# Altium PCB cricket-node-hw__B.PcbDoc (part 2 of 3)
Units mil, origin at the board's own origin, x right, y up, seen from the top; angles counter-clockwise.
Board outline 2830 x 2830 mil, 4 copper layers (Top Layer, GND1, PWR/SIG, Bottom Layer), stack 61.7 mil thick; 153 components, 116 nets, 542 pads, 320 vias.
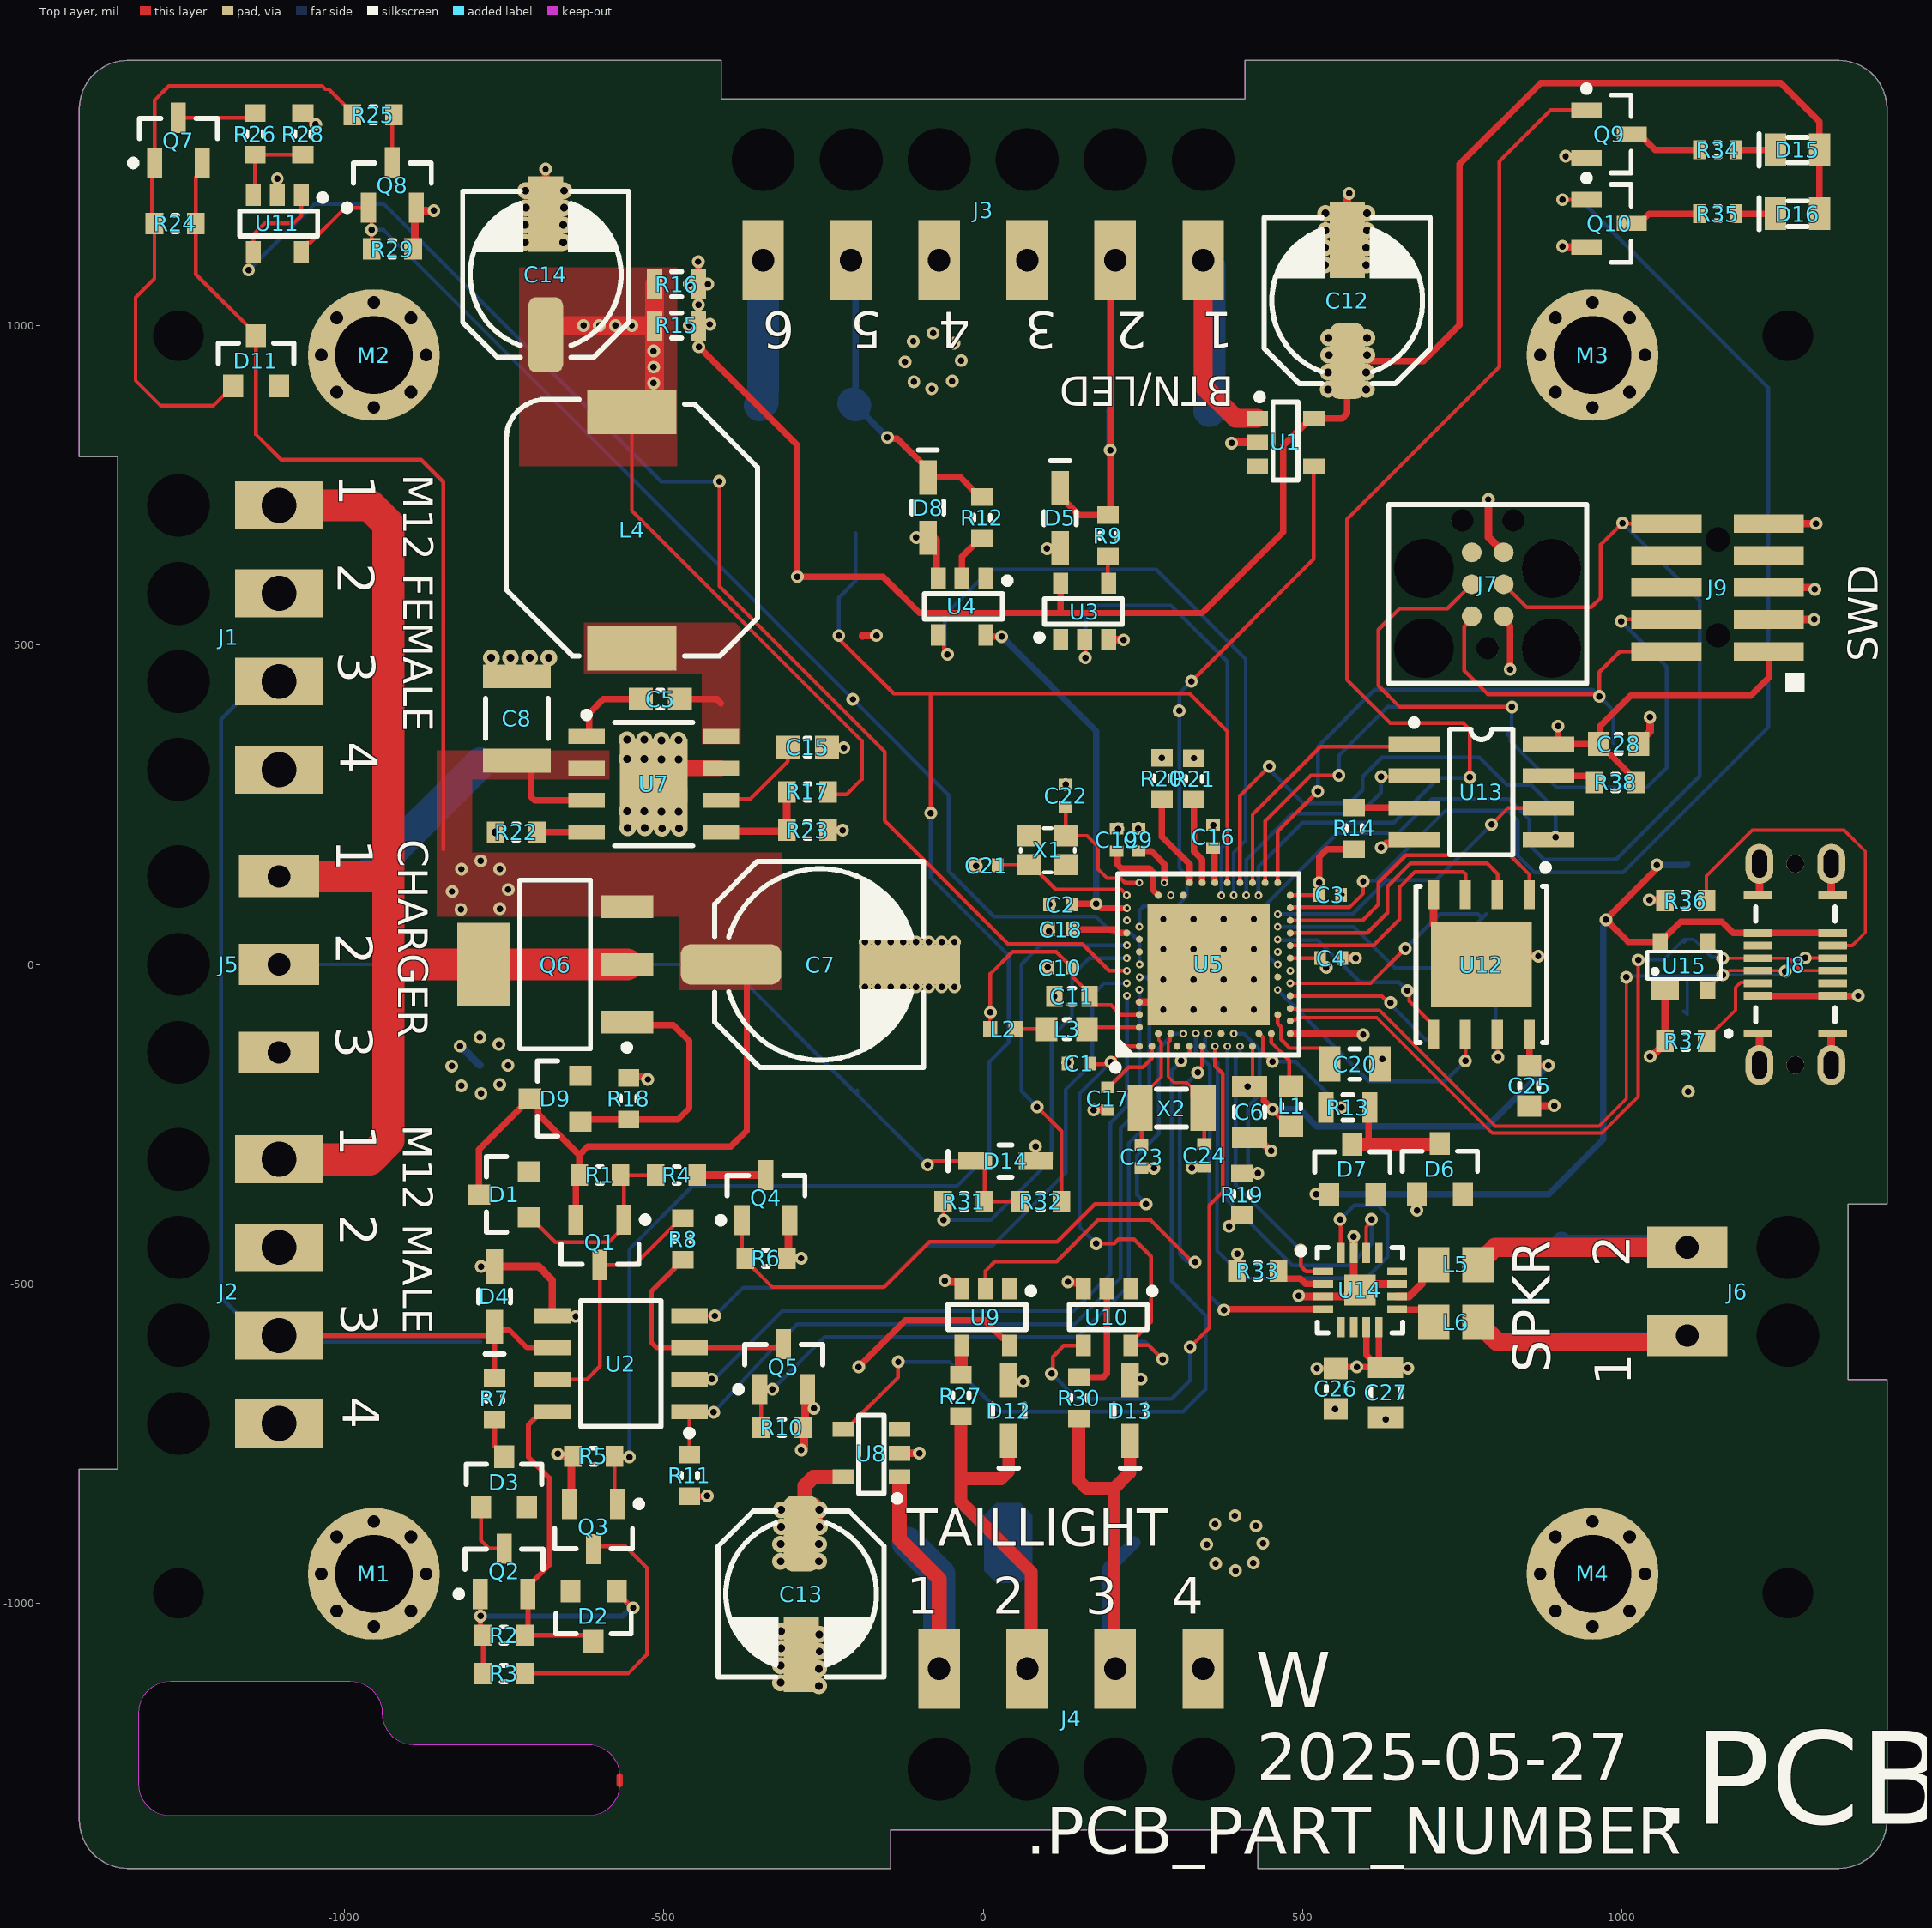
[diagram p0: Top Layer view]

## Part data (continued)
R34 R35: library part ERJ-3EKF3300V, "RES 330 OHM 1/10W 1% 0603 SMD", Limiting Element Voltage=75, Manufacturer="Panasonic Electronic Components", Maximum Overload Voltage=150, Maximum Working Voltage=5.7V, Package="0603 (1608 Metric)", Package Power="0603  (0.1W)", Power (Watts)="0.1W- 1/10W", Ratings=AEC-Q200, Resistance (Ohms)=330, Sort Value=330.0, Sort Value Package=603_330, Supplier Package=603, Temperature Coefficient=±100ppm/°C, Tolerance=±1%, cad-reference=ERJ-3EKF3300V, Category=Resistors, Composition="Thick Film", Features=-, Height=0.55MM, kicad-footprint=R0603_0.55MM_HD:R0603_0.55MM_HD, kicad-symbol=Resistor:R_2P, Manufacturer 1="Panasonic Electronic Components", Manufacturer Part Number=ERJ-3EKF3300V, Manufacturer Part Number 1=ERJ-3EKF3300V, Number of Terminations=2, Packaging="Cut Tape (CT)", Substitution Notes="330 , ±1% , 0603 , AEC-Q200"
R36 R37: library part ERJ-3EKF5101V, "RES 5.1K OHM 1/10W 1% 0603 SMD", JLCPCB Part #=C123727, Limiting Element Voltage=75, Manufacturer="Panasonic Electronic Components", Maximum Overload Voltage=150, Maximum Working Voltage=22.6V, Package="0603 (1608 Metric)", Package Power="0603  (0.1W)", Power (Watts)="0.1W- 1/10W", Ratings=AEC-Q200, Resistance (Ohms)=5.1k, Sort Value=5100, Sort Value Package=603_5100, Supplier Package=0603, Temperature Coefficient=±100ppm/°C, Tolerance=±1%, Category=Resistors, Composition="Thick Film", Features=-, Height=0.55MM, id=5433, is_external=1, Manufacturer 1="Panasonic Electronic Components", Manufacturer Part Number=ERJ-3EKF5101V, Manufacturer Part Number 1=ERJ-3EKF5101V, Number of Terminations=2, Packaging="Cut Tape (CT)", Substitution Notes="5.1k , ±1% , 0603 , AEC-Q200"
TP1 TP2 TP3 TP4 TP5 TP6 TP7 TP8 TP9 TP10 TP11 TP12 TP13 TP14 TP15 TP16 TP17 TP18 TP19 TP20 TP21 TP22 TP23 TP24 TP25 TP26 TP27: library part SMT_TP-1MM, Manufacturer=Wavenumber, cad-reference=SMT_TP-1MM, Flags=NO_BOM, kicad-footprint=SMT_TP-1MM:SMT_TP-1MM, kicad-symbol=SMT_TEST:SMT_TEST, Manufacturer Part Number=SMT_TP-1MM
U1 U8: "2.7V~5.5V 50mΩ 2.5A 1 SOT-25  Power Distribution Switches ROHS", JLCPCB Part #=C3001659, Manufacturer="Diodes Incorporated", cad-reference=AP22804AW5-7, Manufacturer Part Number=AP22804AW5-7
U2: "1 Transceiver Full Duplex 1 SOIC-8 LIN Transceivers ROHS", JLCPCB Part #=C128810, Manufacturer=NXP, id=3710, is_external=1, Manufacturer Part Number=TJA1021T/20/CM,118
U3 U4 U9 U10: "Buffer, Non-Inverting 1 Element 1 Bit per Element Push-Pull Output SOT-23-5", Internal Part Number=NAN, JLCPCB Part #=C100024, Manufacturer="Texas Instruments", Flags=NAN, Manufacturer Part Number=SN74LV1T34DBVR
U5: "Cortex M4 MCU IC RF TXRX+MCU 802.15.4 73QFN", JLCPCB Part #=C190794, Manufacturer=Nordic, Manufacturer Part Number=NRF52840-QIAA-R
U7: "3.8V to 40V Input, 3.5A Low IQ Synchronous Buck Converter", JLCPCB Part #=C2071665, Manufacturer="Diodes Inc", cad-reference=AP64352SP-13, Category=ic, kicad-footprint=SO8-EP:SO8-EP, kicad-symbol=AP64352SP-13:AP64352SP-13, Manufacturer Part Number=AP64352SP-13, table=regulator_switching
U11: "Single 1pA 2V/us 1.9MHz SOT-25 Operational Amplifier ROHS", JLCPCB Part #=C150498, Manufacturer="Diodes Inc", id=3706, is_external=1, Manufacturer Part Number=TLV271CW5-7
U12: "Ultra low power, 64M-bit, serial multi I/O flash memory", JLCPCB Part #=C2802849, Manufacturer=Macronix, Manufacturer Part Number=MX25R6435FZNIL0
U13: "16Kbit 20MHz SPI SOIC-8 FRAM ROHS", Internal Part Number=nan, JLCPCB Part #=C466849, Manufacturer="Infineon Technologies", cad-reference=FM25L16B-GTR, fram#csv.Flags_1=nan, kicad-footprint="SOIC 8:SOIC 8", kicad-symbol=FM25-FRAM:FM25-FRAM, Manufacturer Part Number=FM25L16B-GTR
U14: "Monaural 3.2Wx2@4O TQFN-16-EP(3x3) Audio Amplifiers ROHS", JLCPCB Part #=C910544, Manufacturer=Maxim, Package="TQFN-16 Maxim", Availability=Unavailable, id=9195, is_external=1, Manufacturer Part Number=MAX98357AETE+T, Price=None, SnapEDA_Link=https://www.snapeda.com/parts/MAX98357AETE%2BT/Maxim%20Integrated/view-part/48842/?ref=snap
U15: "6V Unidirectional 5.5V SOT-143 ESD and Surge Protection (TVS/ESD) ROHS", JLCPCB Part #=C12333, Manufacturer=Nexperia, id=3714, is_external=1, Manufacturer Part Number=PRTR5V0U2X,215
X1: library part ECS-320-8-37B-CKY-TR, "32MHz 8pF ±10ppm SMD2016-4P", JLCPCB Part #=C2636238, Manufacturer=ECS, Package Power="PACKAGE (POWER)", cad-reference=ECS-320-8-37B-CKY-TR, Category=crystals/smt, kicad-footprint=XTAL_2016:XTAL_2016, kicad-symbol=Crystal:CRYSTAL-4P--1-3, Manufacturer Part Number=ECS-320-8-37B-CKY-TR
X2: library part NX3215SA-32.768K-STD-MUA-9, "32.768kHz 9pF ±20ppm SMD3215-2P", JLCPCB Part #=C519280, Manufacturer=NDK, Package Power="PACKAGE (POWER)", cad-reference=NX3215SA-32.768K-STD-MUA-9, Category=crystals/smt, kicad-footprint=XTAL_3215:XTAL_3215, kicad-symbol=Crystal:CRYSTAL-2P--1-2, Manufacturer Part Number=NX3215SA-32.768K-STD-MUA-9

## Free pads (board coordinates)
  rect 0x0 hole 78.74 unplated: G1(-1259.84,-984.25) G1(-1259.84,984.25) G1(1259.84,-984.25) G1(1259.84,984.25)

## Via types
v1: diameter 20, hole 10, Top Layer to Bottom Layer, tented both sides, 208 vias
v2: diameter 26, hole 12, Top Layer to Bottom Layer, tented both sides, 61 vias
v3: diameter 12, hole 6, Top Layer to Bottom Layer, tented both sides, 35 vias
v4: diameter 19.68, hole 9.84, Top Layer to Bottom Layer, tented both sides, 16 vias

## Nets (pads, with @x,y where several pads share a name; then routed paths per layer and width w, separated by ;. In a path a pad name is that pad's centre, name@x,y a point inside that pad or via, vN(x,y) a via of type N, cw(c..) or ccw(c..) an arc to the next point about the centre after c; other vN are vias at no path point)
+5v0: C12.1 C13.1 C26.2 C27.2 D6.1 D15.A D16.A J3.6 R15.2 R16.2 TP18.1 U1.5 U3.5 U8.5 U9.5 U14.7 U14.8 | length 5421.4
  Top Layer w10: v1(-446,1100) -445.55,1099.55 R16.2@-445.55,1065 R15.2@-445.55,1000 ; v1(-445.05,966.78) -291,812.73 v1(-291,607) -157,607 -100,550 121.47,550 ; v1(-195,-630) -121.98,-556.98 2.21,-556.98 29.61,-584.37 34.53,-584.37 41.34,-591.18 U9.5@41.34,-596.1 ; U3.5@121.47,596.72 121.47,550 ; v1(522.5,-632.5) C26.2@552,-632.5 554.5,-630 v1(585,-630) 618.54,-630 C27.2@621.05,-632.5 ; U14.7@599.84,-568.07 599.84,-611.3 C27.2@621.05,-632.5 ; U14.8@619.53,-568.07 619.53,-620.16 C27.2@630,-630.63 628.13,-632.5 C27.2@621.05,-632.5 ; v1(679,-385) 678,-384 678,-360.35 D6.1@678.98,-359.37 ; D16.A@1309.45,1175 D15.A@1309.45,1275 1309.45,1283.86 1309.45,1319.55 1249,1380 873,1380 746,1253 746,1001 689.51,944.51 C12.1@570,944.51 570,862.61 562.2,854.8 512.66,854.8 470,812.14 470,677 343,550 121.47,550
  Top Layer w23: v2(-256.35,-853.85) -281.15,-853.85 -279.06,-851.75 -279.06,-815.88 -265.59,-802.4 U8.5@-219.29,-802.4
  Top Layer w30: C13.1@-285,-891.02 -266.3,-872.33 C13.1@-266.3,-849.41
  PWR/SIG w10: v1(-428,1002) -248,1002 ; v1@-195,-625.54 -195,-664.14 -189.14,-670 -64,-670 45,-561 351,-561 422.5,-632.5 v1(522.5,-632.5) ; v1(664.63,-631.72) 664.24,-632.11 522.89,-632.11 v1(522.5,-632.5) ; v1(679,-385) 679,-421 522.5,-577.5 v1(522.5,-632.5)
  Bottom Layer w50: TP18.1@-350,875 -345.22,879.78 -345.22,897.46 -344.49,898.19 J3.6@-344.49,1102.36
  other v1: -460,1000 -445.55,1032.5 -460,1065 -431,1065
  other v2: -317.18,-934.48 -257.18,-934.48 -317.18,-907.48 -257.18,-907.48 -316.18,-880.48 -256.18,-880.48 -316.35,-853.85 540,900 600,900 540,927 600,927 541,954 601,954 540.83,980.63 600.83,980.63
+5v0-CH0: J3.1 TP8.1 U1.1 | length 542.7
  Top Layer w20: J3.1@344.49,1072.36 J3.1@344.49,1102.36
  Top Layer w30: J3.1@344.49,1072.36 344.49,905.51 395.2,854.8 U1.1@429,854.8
  Bottom Layer w20: J3.1@344.49,1102.36 J3.1@354.33,1092.52
  Bottom Layer w50: TP8.1@354.33,866.14 J3.1@354.33,1092.52
+5v0-CH1: J4.1 TP12.1 U8.1 | length 542.8
  Top Layer w23: U8.1@-130.71,-802.4 -130.71,-900.29 -68.9,-962.1 J4.1@-68.9,-1102.36
  Bottom Layer w50: TP12.1@-118.11,-905.51 -68.9,-954.72 J4.1@-68.9,-1102.36